# EAGLE board CT_schematic (EAGLE 7.6.0)

Size 100 x 80 mm. Coordinates in mm from the lower left corner, seen from the top.
Outline: 0,0 100,0 100,80 0,80 0,0
Copper layers (1*16): Top 0.035mm / dielectric 1.5mm / Bottom 0.035mm
Design rules "default": minimum track width 10mil, minimum drill 24mil, track to track 8mil, track to pad 8mil, pad to pad 8mil, via to via 8mil, smd to smd 8mil, copper to edge 40mil, drill to drill 8mil, minimum pad ring 10mil, minimum via ring 8mil, stop-mask expansion 4mil, vias tented up to drill 0mil, thermal gap 10mil

## Footprints (pad centres in the part's own frame; a part is rotated, then mirrored left to right if it is on the bottom)
C0603 = smd 0.8 x 0.8: 1 -0.762,0; 2 0.762,0
C0402 = smd 0.5 x 0.5: 1 -0.508,0; 2 0.508,0
C0805 = smd 1.2 x 1.3: 1 -1.016,0; 2 1.016,0
C1210 = smd 1.2 x 2.5: 1 -1.524,0; 2 1.524,0
EXV-9H = smd 3.505 x 1.676: 1 -2.857,0; 2 2.857,0
IND25X25CZ = smd 2.489 x 3.429: 1 -2.718,0; 2 2.718,0
PJ-037B_PACKAGE = drill 3.7 square: 1 12,0 | drill 3.2 square: 2 6,0
R0603 = smd 0.8 x 0.8: 1 -0.762,0; 2 0.762,0
LQFP144 = smd 0.35 x 1.35: 1 -8.75,-10.625; 2 -8.25,-10.625; 3 -7.75,-10.625; 4 -7.25,-10.625; 5 -6.75,-10.625; 6 -6.25,-10.625; 7 -5.75,-10.625; 8 -5.25,-10.625; 9 -4.75,-10.625; 10 -4.25,-10.625; 11 -3.75,-10.625; 12 -3.25,-10.625; 13 -2.75,-10.62; 14 -2.25,-10.625; 15 -1.75,-10.625; 16 -1.25,-10.625; 17 -0.75,-10.625; 18 -0.25,-10.625; 19 0.25,-10.625; 20 0.75,-10.625; 21 1.25,-10.625; 22 1.75,-10.625; 23 2.25,-10.625; 24 2.75,-10.62; 25 3.25,-10.625; 26 3.75,-10.625; 27 4.25,-10.625; 28 4.75,-10.625; 29 5.25,-10.625; 30 5.75,-10.625; 31 6.25,-10.625; 32 6.75,-10.625; 33 7.25,-10.625; 34 7.75,-10.625; 35 8.25,-10.625; 36 8.75,-10.625; 73 8.75,10.625; 74 8.25,10.625; 75 7.75,10.625; 76 7.25,10.625; 77 6.75,10.625; 78 6.25,10.625; 79 5.75,10.625; 80 5.25,10.625; 81 4.75,10.625; 82 4.25,10.625; 83 3.75,10.625; 84 3.25,10.625; 85 2.75,10.625; 86 2.25,10.625; 87 1.75,10.625; 88 1.25,10.625; 89 0.75,10.625; 90 0.25,10.625; 91 -0.25,10.625; 92 -0.75,10.625; 93 -1.25,10.625; 94 -1.75,10.625; 95 -2.25,10.625; 96 -2.75,10.625; 97 -3.25,10.625; 98 -3.75,10.625; 99 -4.25,10.625; 100 -4.75,10.625; 101 -5.25,10.625; 102 -5.75,10.625; 103 -6.25,10.625; 104 -6.75,10.625; 105 -7.25,10.625; 106 -7.75,10.625; 107 -8.25,10.625; 108 -8.75,10.625 | smd 1.35 x 0.35: 37 10.625,-8.75; 38 10.625,-8.25; 39 10.625,-7.75; 40 10.625,-7.25; 41 10.625,-6.75; 42 10.625,-6.25; 43 10.625,-5.75; 44 10.625,-5.25; 45 10.625,-4.75; 46 10.625,-4.25; 47 10.625,-3.75; 48 10.625,-3.25; 49 10.625,-2.75; 50 10.625,-2.25; 51 10.625,-1.75; 52 10.625,-1.25; 53 10.625,-0.75; 54 10.625,-0.25; 55 10.625,0.25; 56 10.625,0.75; 57 10.625,1.25; 58 10.625,1.75; 59 10.625,2.25; 60 10.625,2.75; 61 10.625,3.25; 62 10.625,3.75; 63 10.625,4.25; 64 10.625,4.75; 65 10.625,5.25; 66 10.625,5.75; 67 10.625,6.25; 68 10.625,6.75; 69 10.625,7.25; 70 10.625,7.75; 71 10.625,8.25; 72 10.625,8.75; 109 -10.625,8.75; 110 -10.625,8.25; 111 -10.625,7.75; 112 -10.625,7.25; 113 -10.625,6.75; 114 -10.625,6.25; 115 -10.625,5.75; 116 -10.625,5.25; 117 -10.625,4.75; 118 -10.625,4.25; 119 -10.625,3.75; 120 -10.625,3.25; 121 -10.625,2.75; 122 -10.625,2.25; 123 -10.625,1.75; 124 -10.625,1.25; 125 -10.625,0.75; 126 -10.625,0.25; 127 -10.625,-0.25; 128 -10.625,-0.75; 129 -10.625,-1.25; 130 -10.625,-1.75; 131 -10.625,-2.25; 132 -10.625,-2.75; 133 -10.625,-3.25; 134 -10.625,-3.75; 135 -10.625,-4.25; 136 -10.625,-4.75; 137 -10.625,-5.25; 138 -10.625,-5.75; 139 -10.625,-6.25; 140 -10.625,-6.75; 141 -10.625,-7.25; 142 -10.625,-7.75; 143 -10.625,-8.25; 144 -10.625,-8.75
VFBGA48 = smd 0.35 x 0.35: A1 -1.875,2.625; A2 -1.125,2.625; A3 -0.375,2.625; A4 0.375,2.625; A5 1.125,2.625; A6 1.875,2.625; B1 -1.875,1.875; B2 -1.125,1.875; B3 -0.375,1.875; B4 0.375,1.875; B5 1.125,1.875; B6 1.875,1.875; C1 -1.875,1.125; C2 -1.125,1.125; C3 -0.375,1.125; C4 0.375,1.125; C5 1.125,1.125; C6 1.875,1.125; D1 -1.875,0.375; D2 -1.125,0.375; D3 -0.375,0.375; D4 0.375,0.375; D5 1.125,0.375; D6 1.875,0.375; E1 -1.875,-0.375; E2 -1.125,-0.375; E3 -0.375,-0.375; E4 0.375,-0.375; E5 1.125,-0.375; E6 1.875,-0.375; F1 -1.875,-1.125; F2 -1.125,-1.125; F3 -0.375,-1.125; F4 0.375,-1.125; F5 1.125,-1.125; F6 1.875,-1.125; G1 -1.875,-1.875; G2 -1.125,-1.875; G3 -0.375,-1.875; G4 0.375,-1.875; G5 1.125,-1.875; G6 1.875,-1.875; H1 -1.875,-2.625; H2 -1.125,-2.625; H3 -0.375,-2.625; H4 0.375,-2.625; H5 1.125,-2.625; H6 1.875,-2.625
SAMTEC_FTSH-105-01-L-DV-K = smd 0.762 x 2.794: 1 -2.54,-2.032; 2 -2.54,2.032; 3 -1.27,-2.032; 4 -1.27,2.032; 5 0,-2.032; 6 0,2.032; 7 1.27,-2.032; 8 1.27,2.032; 9 2.54,-2.032; 10 2.54,2.032
MOLEX_47219-2001 = smd 0.8 x 1.5: 1 3.2,-2.1; 2 2.1,-2.1; 3 1,-2.1; 4 -0.1,-2.1; 5 -1.2,-2.1; 6 -2.3,-2.1; 7 -3.4,-2.1; 8 -4.5,-2.1 | smd 1.5 x 2.05: G1 6.875,-4.7; G2 6.875,3.6; G3 -6.875,3.6; G4 -6.875,-4.7
WFDN-8 = smd 0.48 x 0.7: 1 0,0; 2 1.27,0; 3 2.54,0; 4 3.81,0; 5 3.81,4.45; 6 2.54,4.45; 7 1.27,4.45; 8 0,4.45 | smd 4 x 3: 9 1.89,2.25
USB-A-H = drill 0.914: 1 2.718,3.493; 2 2.718,1.003; 3 2.718,-1.003; 4 2.718,-3.493 | drill 2.311: 5 0,-6.566; 6 0,6.566
SOT143B = smd 1 x 0.7: 1 -0.75,-1 | smd 0.6 x 0.7: 2 0.95,-1; 3 0.95,1; 4 -0.95,1
ABS07-32.768KHZ-7-T = smd 1.1 x 2.4: 1 -2.5,0; 2 0,0
ABLS-25.000MHZ-B2F-T = smd 5.6 x 2.8: 1 -3.81,0; 2 5.69,0
IR3899MTR1PBF = smd 0.25 x 0.75: 1 0,0; 2 0.5,0; 3 1,0; 4 1.5,0; 5 2,0; 6 2.5,0; 7 3,0 | smd 0.75 x 0.25: 8 3.425,0.78; 9 3.425,1.28; 10 3.425,1.78; 14 -0.425,1.78; 15 -0.425,1.28; 16 -0.425,0.78 | smd 0.3 x 1.95: 11 3.22,3.63 | smd 1.62 x 2.42: 12 1.786,3.8 | smd 1 x 1.95: 13 0.117,3.63 | smd 2.19 x 1.25: 17 1.51,1.26
SON-6 = smd 0.55 x 0.3: 1 -0.355,0.5 | smd 0.52 x 0.3: 2 -0.37,0; 3 -0.37,-0.5; 4 0.37,-0.5; 5 0.37,0; 6 0.37,0.5
SW_4-1437565-2 = smd 1.4 x 2.1: 1 -2.23,4.55; 2 -2.23,-4.55; 3 2.23,4.55; 4 2.23,-4.55
LGM67K-G1J2-24-Z = smd 0.8 x 1.4: A -2,0; C 0,0
NC7SZ125M5X = smd 1.3 x 0.7: 1 -1.3,0.95; 2 -1.3,0; 3 -1.3,-0.95; 4 1.3,-0.95; 5 1.3,0.95

## Placement (x,y rotation side)
C1  1e-06  [C0603]  -80.01,72.39 0 top  (outside the outline)
C2  1e-07  [C0603]  -15.24,77.47 0 top  (outside the outline)
C3  1e-07  [C0603]  -19.05,77.47 0 top  (outside the outline)
C4  1e-07  [C0603]  -22.86,77.47 0 top  (outside the outline)
C5  1e-07  [C0603]  -26.67,77.47 0 top  (outside the outline)
C6  1e-07  [C0603]  -30.48,77.47 0 top  (outside the outline)
C7  1e-07  [C0603]  -34.29,77.47 0 top  (outside the outline)
C8  1e-07  [C0603]  -38.1,77.47 0 top  (outside the outline)
C9  1e-07  [C0603]  -41.91,77.47 0 top  (outside the outline)
C10  1e-07  [C0603]  -45.72,77.47 0 top  (outside the outline)
C11  1e-07  [C0603]  -49.53,77.47 0 top  (outside the outline)
C12  1e-07  [C0603]  -53.34,77.47 0 top  (outside the outline)
C13  1e-07  [C0603]  -57.15,77.47 0 top  (outside the outline)
C14  4.7e-06  [C0603]  -64.77,72.39 0 top  (outside the outline)
C15  1e-07  [C0603]  -60.96,77.47 0 top  (outside the outline)
C16  1e-07  [C0603]  -64.77,77.47 0 top  (outside the outline)
C17  1e-07  [C0603]  -68.58,77.47 0 top  (outside the outline)
C18  1e-08  [C0603]  -72.39,77.47 0 top  (outside the outline)
C19  1e-06  [C0603]  -76.2,77.47 0 top  (outside the outline)
C20  1e-11  [C0402]  -39.37,82.55 0 top  (outside the outline)
C21  1e-11  [C0402]  -43.18,82.55 0 top  (outside the outline)
C22  1e-11  [C0402]  -46.99,82.55 0 top  (outside the outline)
C23  1e-11  [C0402]  -50.8,82.55 0 top  (outside the outline)
C24  1e-07  [C0402]  -54.61,82.55 0 top  (outside the outline)
C25  2.2e-06  [C0603]  -68.58,72.39 0 top  (outside the outline)
C26  1e-07  [C0402]  -58.42,82.55 0 top  (outside the outline)
C27  1e-07  [C0402]  -62.23,82.55 0 top  (outside the outline)
C28  1e-05  [C0805]  -46.99,59.69 0 top  (outside the outline)
C29  1e-07  [C0402]  -66.04,82.55 0 top  (outside the outline)
C30  0.0001  [C1210]  -29.21,60.96 0 top  (outside the outline)
C31  2.2e-06  [C0603]  -72.39,72.39 0 top  (outside the outline)
C32  1e-07  [C0402]  -69.85,82.55 0 top  (outside the outline)
C33  1e-07  [C0402]  -73.66,82.55 0 top  (outside the outline)
C34  8.2e-09  [C0402]  -35.56,82.55 0 top  (outside the outline)
C35  2.7e-07  [C0603]  -76.2,72.39 0 top  (outside the outline)
C38  1e-07  [C0402]  -77.47,82.55 0 top  (outside the outline)
C39  0.0001  [EXV-9H]  -71.12,41.91 0 top  (outside the outline)
C40  0.0001  [EXV-9H]  -17.78,53.34 0 top  (outside the outline)
C41  1e-08  [C0402]  -81.28,82.55 0 top  (outside the outline)
C42  1e-08  [C0402]  -15.24,87.63 0 top  (outside the outline)
I1  6.8e-07  [IND25X25CZ]  -48.26,53.34 0 top  (outside the outline)
J1  PJ-037B  [PJ-037B_PACKAGE]  -57.15,30.48 0 top  (outside the outline)
R2  1000.0  [R0603]  -80.01,77.47 0 top  (outside the outline)
R4  4700.0  [R0603]  -15.24,82.55 0 top  (outside the outline)
R5  10000.0  [R0603]  -71.12,67.31 0 top  (outside the outline)
R6  10000.0  [R0603]  -76.2,67.31 0 top  (outside the outline)
R7  10000.0  [R0603]  -15.24,72.39 0 top  (outside the outline)
R8  10000.0  [R0603]  -20.32,72.39 0 top  (outside the outline)
R9  10000.0  [R0603]  -25.4,72.39 0 top  (outside the outline)
R10  10000.0  [R0603]  -30.48,72.39 0 top  (outside the outline)
R11  10000.0  [R0603]  -35.56,72.39 0 top  (outside the outline)
R12  10000.0  [R0603]  -40.64,72.39 0 top  (outside the outline)
R13  5.0  [R0603]  -19.05,82.55 0 top  (outside the outline)
R14  100000.0  [R0603]  -15.24,67.31 0 top  (outside the outline)
R15  100000.0  [R0603]  -20.32,67.31 0 top  (outside the outline)
R16  100000.0  [R0603]  -25.4,67.31 0 top  (outside the outline)
R17  100000.0  [R0603]  -30.48,67.31 0 top  (outside the outline)
R18  100000.0  [R0603]  -35.56,67.31 0 top  (outside the outline)
R19  100000.0  [R0603]  -40.64,67.31 0 top  (outside the outline)
R20  100000.0  [R0603]  -45.72,67.31 0 top  (outside the outline)
R21  100000.0  [R0603]  -50.8,67.31 0 top  (outside the outline)
R22  100000.0  [R0603]  -55.88,67.31 0 top  (outside the outline)
R23  0.1  [R0603]  -22.86,82.55 0 top  (outside the outline)
R24  4030.2416170974  [R0603]  -55.88,59.69 0 top  (outside the outline)
R25  719.68600305311  [R0603]  -63.5,59.69 0 top  (outside the outline)
R26  64.583209876543  [R0603]  -71.12,59.69 0 top  (outside the outline)
R27  130.0  [R0603]  -26.67,82.55 0 top  (outside the outline)
R28  39000.0  [R0603]  -45.72,72.39 0 top  (outside the outline)
R29  49900.0  [R0603]  -50.8,72.39 0 top  (outside the outline)
R30  5359.1232876712  [R0603]  -78.74,59.69 0 top  (outside the outline)
R31  10000.0  [R0603]  -55.88,72.39 0 top  (outside the outline)
R32  10000.0  [R0603]  -60.96,72.39 0 top  (outside the outline)
R33  9100.0  [R0603]  -30.48,82.55 0 top  (outside the outline)
R34  680000.0  [R0603]  -60.96,67.31 0 top  (outside the outline)
R35  120000.0  [R0603]  -66.04,67.31 0 top  (outside the outline)
U1  STM32L476ZET6  [LQFP144]  -24.13,11.43 0 top  (outside the outline)
U2  CY62147GE30-45BVXI  [VFBGA48]  -74.93,29.21 0 top  (outside the outline)
U3  FTSH-105-01-L-DV-K  [SAMTEC_FTSH-105-01-L-DV-K]  -35.56,30.48 0 top  (outside the outline)
U4  0472192001  [MOLEX_47219-2001]  -62.23,8.89 0 top  (outside the outline)
U5  SST26VF016B-104I/MF  [WFDN-8]  -64.77,40.64 0 top  (outside the outline)
U6  61400416021  [USB-A-H]  -41.91,8.89 0 top  (outside the outline)
U7  prtr5v0u2ax  [SOT143B]  -27.94,87.63 0 top  (outside the outline)
U8  ABS07-32.768KHZ-7-T  [ABS07-32.768KHZ-7-T]  -67.31,53.34 0 top  (outside the outline)
U9  ABLS-25.000MHZ-B2F-T  [ABLS-25.000MHZ-B2F-T]  -36.83,53.34 0 top  (outside the outline)
U10  IR3899MTR1PBF  [IR3899MTR1PBF]  -44.45,40.64 0 top  (outside the outline)
U11  TPS3895ADRYR  [SON-6]  -31.75,86.36 0 top  (outside the outline)
U12  4-1437565-2  [SW_4-1437565-2]  -27.94,43.18 0 top  (outside the outline)
U13  Q65110A2395  [LGM67K-G1J2-24-Z]  -17.78,60.96 0 top  (outside the outline)
U14  nc7sz125m5x  [NC7SZ125M5X]  -34.29,59.69 0 top  (outside the outline)
U15  nc7sz125m5x  [NC7SZ125M5X]  -40.64,59.69 0 top  (outside the outline)

## Library data of the parts
C1-C35 C38-C42 I1 J1 R2 R4-R35 U1-U15 = circuit_tree

## Nets
CLK_CRYSTAL_U1_8: C20.1 U1.8 U8.1
CLK_CRYSTAL_U1_9: C21.1 U1.9 U8.2
CLK_CRYSTAL_U1_23: C22.1 U1.23 U9.1
CLK_CRYSTAL_U1_24: C23.1 U1.24 U9.2
GND: C1.2 C2.2 C3.2 C4.2 C5.2 C6.2 C7.2 C8.2 C9.2 C10.2 C11.2 C12.2 C13.2 C14.2 C15.2 C16.2 C17.2 C18.2 C19.2 C20.2 C21.2 C22.2 C23.2 C24.2 C25.2 C26.2 C27.2 C28.2 C29.2 C31.2 C32.2 C33.2 C38.2 C39.2 C40.2 C41.2 C42.2 J1.2 R2.2 R5.2 R12.2 R13.2 R23.1 R23.2 R25.2 R28.2 R30.2 R33.2 R35.2 U1.16 U1.30 U1.31 U1.38 U1.51 U1.61 U1.71 U1.83 U1.94 U1.107 U1.120 U1.130 U1.143 U2.D1 U2.E6 U3.3 U3.5 U4.6 U4.G1 U4.G2 U4.G3 U4.G4 U5.4 U5.9 U6.4 U6.5 U6.6 U7.1 U10.4 U10.11 U10.17 U11.2 U13.C U14.2 U14.3 U15.1 U15.3
NET_U1_25: R4.1 U1.25 U15.4
NET_U1_138: R5.1 U1.138
NET_U1_140: U13.A
NET_U1_142: U12.3 U12.4
NET_U3_9: R13.1 U3.9
NET_U10_1: C34.1 R24.1 R25.1 R26.1 R27.1 U10.1 U10.8
NET_U10_2: C33.1 U10.2
NET_U10_3: C34.2 C35.1 C35.2 U10.3
NET_U10_5: R28.1 U10.5
NET_U10_10: C31.1 U10.10
NET_U10_12: C30.1 I1.1 U10.12
NET_U10_13: U10.13
NET_U10_14: C30.2 U10.14
NET_U10_15: R29.1 R30.1 U10.15
NET_U10_ATNET_3: I1.2 R24.2
NET_U10_ATNET_4: C35.2 R26.2
NET_U10_ATNET_5: R27.2
NET_U11_1: R32.1 R33.1 U11.1
NET_U11_3: R34.2 R35.1 U11.3
NET_U11_4: R31.1 U11.4 U14.4 U15.2
NET_U12_1: R2.1 U12.1 U12.2
PROC_FMC_A0: U1.10 U2.A3
PROC_FMC_A1: U1.11 U2.A4
PROC_FMC_A2: U1.12 U2.A5
PROC_FMC_A3: U1.13 U2.B3
PROC_FMC_A4: U1.14 U2.B4
PROC_FMC_A5: U1.15 U2.C3
PROC_FMC_A6: U1.50 U2.C4
PROC_FMC_A7: U1.53 U2.D4
PROC_FMC_A8: U1.54 U2.H2
PROC_FMC_A9: U1.55 U2.H3
PROC_FMC_A10: U1.56 U2.H4
PROC_FMC_A11: U1.57 U2.H5
PROC_FMC_A12: U1.87 U2.G3
PROC_FMC_A13: U1.88 U2.G4
PROC_FMC_A14: U1.89 U2.F3
PROC_FMC_A15: U1.90 U2.F4
PROC_FMC_A16: U1.80 U2.E4
PROC_FMC_A17: U1.81 U2.D3
PROC_FMC_D0: U1.85 U2.B6
PROC_FMC_D1: U1.86 U2.C5
PROC_FMC_D2: U1.114 U2.C6
PROC_FMC_D3: U1.115 U2.D5
PROC_FMC_D4: U1.58 U2.E5
PROC_FMC_D5: U1.59 U2.F5
PROC_FMC_D6: U1.60 U2.F6
PROC_FMC_D7: U1.63 U2.G6
PROC_FMC_D8: U1.64 U2.B1
PROC_FMC_D9: U1.65 U2.C1
PROC_FMC_D10: U1.66 U2.C2
PROC_FMC_D11: U1.67 U2.D2
PROC_FMC_D12: U1.68 U2.E2
PROC_FMC_D13: U1.77 U2.F2
PROC_FMC_D14: U1.78 U2.F1
PROC_FMC_D15: U1.79 U2.G1
PROC_FMC_NBL0: U1.141 U2.A1
PROC_FMC_NE2: R7.1 U1.124 U2.B5
PROC_FMC_NOE: R6.1 U1.118 U2.A2
PROC_FMC_NWE: R8.1 U1.119 U2.G5
PROC_QUADSPI_BK1_IO0: U1.47 U5.5
PROC_QUADSPI_BK1_IO1: U1.46 U5.2
PROC_QUADSPI_BK1_IO2: R21.1 U1.43 U5.3
PROC_QUADSPI_BK1_IO3: R22.1 U1.42 U5.7
PROC_QUADSPI_CLK: U1.69 U5.6
PROC_QUADSPI_NCS: R20.1 U1.70 U5.1
PROC_SDMMC1_CK: R15.1 U1.113 U4.5
PROC_SDMMC1_CMD: R14.1 U1.116 U4.3
PROC_SDMMC1_D0: R16.1 U1.98 U4.7
PROC_SDMMC1_D1: R17.1 U1.99 U4.8
PROC_SDMMC1_D2: R18.1 U1.111 U4.1
PROC_SDMMC1_D3: R19.1 U1.112 U4.2
PROC_SYS_JTCK_SWCLK: R12.1 U1.109 U3.4
PROC_SYS_JTDI: R10.1 U1.110 U3.8
PROC_SYS_JTDO_SWO: U1.133 U3.6
PROC_SYS_JTMS_SWDIO: R11.1 U1.105 U3.2
PROC_USB_OTG_FS_DM: U1.103 U6.2 U7.3
PROC_USB_OTG_FS_DP: U1.104 U6.3 U7.2
PROC_USB_OTG_FS_VBUS: U1.101 U6.1 U7.4
RST_OUT_U3_JTAG_RST_B: R9.1 U3.10 U14.1
VCC_S1_16V2: C32.1 C39.1 C40.1 J1.1 R29.2 U10.9
VCC_TIER1_3V3: C1.1 C2.1 C3.1 C4.1 C5.1 C6.1 C7.1 C8.1 C9.1 C10.1 C11.1 C12.1 C13.1 C14.1 C15.1 C16.1 C17.1 C18.1 C19.1 C24.1 C25.1 C26.1 C27.1 C28.1 C29.1 C38.1 C41.1 C42.1 I1.2 R4.2 R6.2 R7.2 R8.2 R9.2 R10.2 R11.2 R14.2 R15.2 R16.2 R17.2 R18.2 R19.2 R20.2 R21.2 R22.2 R24.2 R31.2 R32.2 R34.1 U1.6 U1.17 U1.32 U1.33 U1.39 U1.52 U1.62 U1.72 U1.84 U1.95 U1.106 U1.108 U1.121 U1.131 U1.144 U2.D6 U2.E1 U3.1 U4.4 U5.8 U11.6 U14.5 U15.5

## Tracks (layer width: path | path; a pad name or v marks a point on that pad's centre or on a via)
CLK_CRYSTAL_U1_8  (2 unrouted)
CLK_CRYSTAL_U1_9  (2 unrouted)
CLK_CRYSTAL_U1_23  (2 unrouted)
CLK_CRYSTAL_U1_24  (2 unrouted)
GND  (85 unrouted)
NET_U1_25  (2 unrouted)
NET_U1_138  (1 unrouted)
NET_U1_142  (1 unrouted)
NET_U3_9  (1 unrouted)
NET_U10_1  (6 unrouted)
NET_U10_2  (1 unrouted)
NET_U10_3  (3 unrouted)
NET_U10_5  (1 unrouted)
NET_U10_10  (1 unrouted)
NET_U10_12  (2 unrouted)
NET_U10_14  (1 unrouted)
NET_U10_15  (2 unrouted)
NET_U10_ATNET_3  (1 unrouted)
NET_U10_ATNET_4  (1 unrouted)
NET_U11_1  (2 unrouted)
NET_U11_3  (2 unrouted)
NET_U11_4  (3 unrouted)
NET_U12_1  (2 unrouted)
PROC_FMC_A0  (1 unrouted)
PROC_FMC_A1  (1 unrouted)
PROC_FMC_A2  (1 unrouted)
PROC_FMC_A3  (1 unrouted)
PROC_FMC_A4  (1 unrouted)
PROC_FMC_A5  (1 unrouted)
PROC_FMC_A6  (1 unrouted)
PROC_FMC_A7  (1 unrouted)
PROC_FMC_A8  (1 unrouted)
PROC_FMC_A9  (1 unrouted)
PROC_FMC_A10  (1 unrouted)
PROC_FMC_A11  (1 unrouted)
PROC_FMC_A12  (1 unrouted)
PROC_FMC_A13  (1 unrouted)
PROC_FMC_A14  (1 unrouted)
PROC_FMC_A15  (1 unrouted)
PROC_FMC_A16  (1 unrouted)
PROC_FMC_A17  (1 unrouted)
PROC_FMC_D0  (1 unrouted)
PROC_FMC_D1  (1 unrouted)
PROC_FMC_D2  (1 unrouted)
PROC_FMC_D3  (1 unrouted)
PROC_FMC_D4  (1 unrouted)
PROC_FMC_D5  (1 unrouted)
PROC_FMC_D6  (1 unrouted)
PROC_FMC_D7  (1 unrouted)
PROC_FMC_D8  (1 unrouted)
PROC_FMC_D9  (1 unrouted)
PROC_FMC_D10  (1 unrouted)
PROC_FMC_D11  (1 unrouted)
PROC_FMC_D12  (1 unrouted)
PROC_FMC_D13  (1 unrouted)
PROC_FMC_D14  (1 unrouted)
PROC_FMC_D15  (1 unrouted)
PROC_FMC_NBL0  (1 unrouted)
PROC_FMC_NE2  (2 unrouted)
PROC_FMC_NOE  (2 unrouted)
PROC_FMC_NWE  (2 unrouted)
PROC_QUADSPI_BK1_IO0  (1 unrouted)
PROC_QUADSPI_BK1_IO1  (1 unrouted)
PROC_QUADSPI_BK1_IO2  (2 unrouted)
PROC_QUADSPI_BK1_IO3  (2 unrouted)
PROC_QUADSPI_CLK  (1 unrouted)
PROC_QUADSPI_NCS  (2 unrouted)
PROC_SDMMC1_CK  (2 unrouted)
PROC_SDMMC1_CMD  (2 unrouted)
PROC_SDMMC1_D0  (2 unrouted)
PROC_SDMMC1_D1  (2 unrouted)
PROC_SDMMC1_D2  (2 unrouted)
PROC_SDMMC1_D3  (2 unrouted)
PROC_SYS_JTCK_SWCLK  (2 unrouted)
PROC_SYS_JTDI  (2 unrouted)
PROC_SYS_JTDO_SWO  (1 unrouted)
PROC_SYS_JTMS_SWDIO  (2 unrouted)
PROC_USB_OTG_FS_DM  (2 unrouted)
PROC_USB_OTG_FS_DP  (2 unrouted)
PROC_USB_OTG_FS_VBUS  (2 unrouted)
RST_OUT_U3_JTAG_RST_B  (2 unrouted)
VCC_S1_16V2  (5 unrouted)
VCC_TIER1_3V3  (71 unrouted)